# EAGLE board stm32rf_node_panelized (EAGLE 8.6.1)
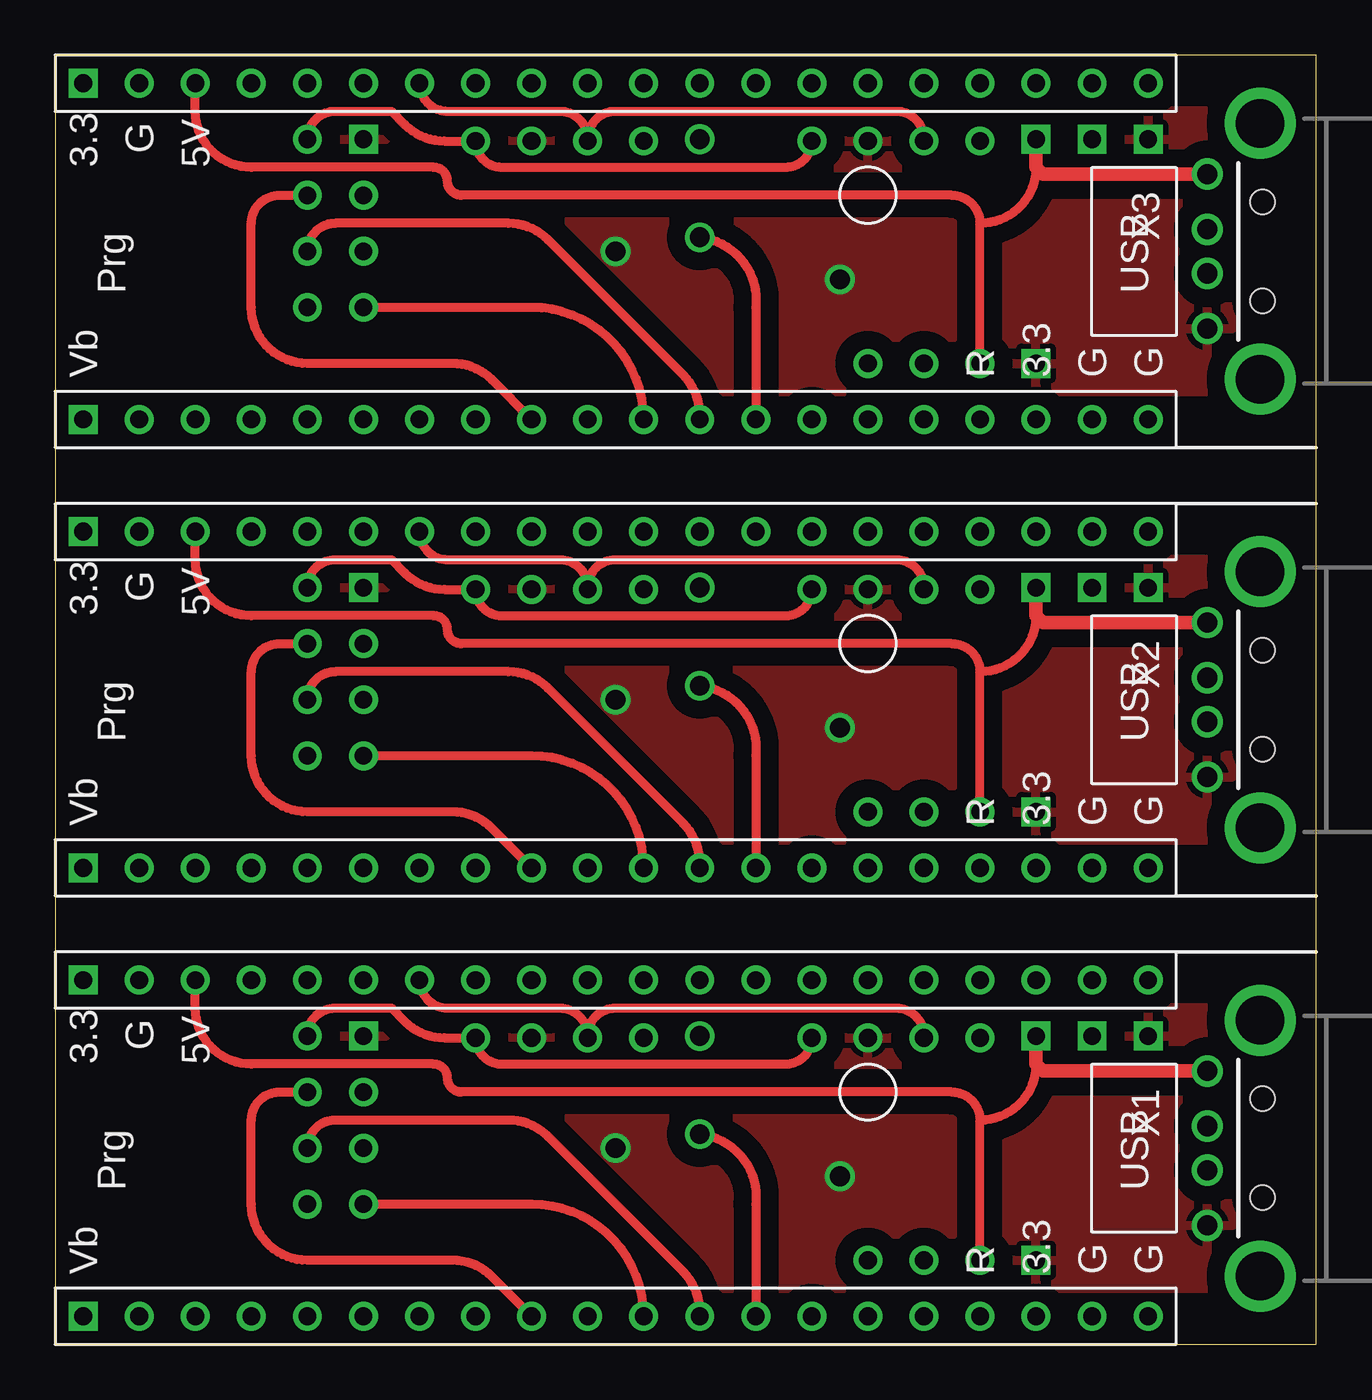
[diagram p0: board, top side]
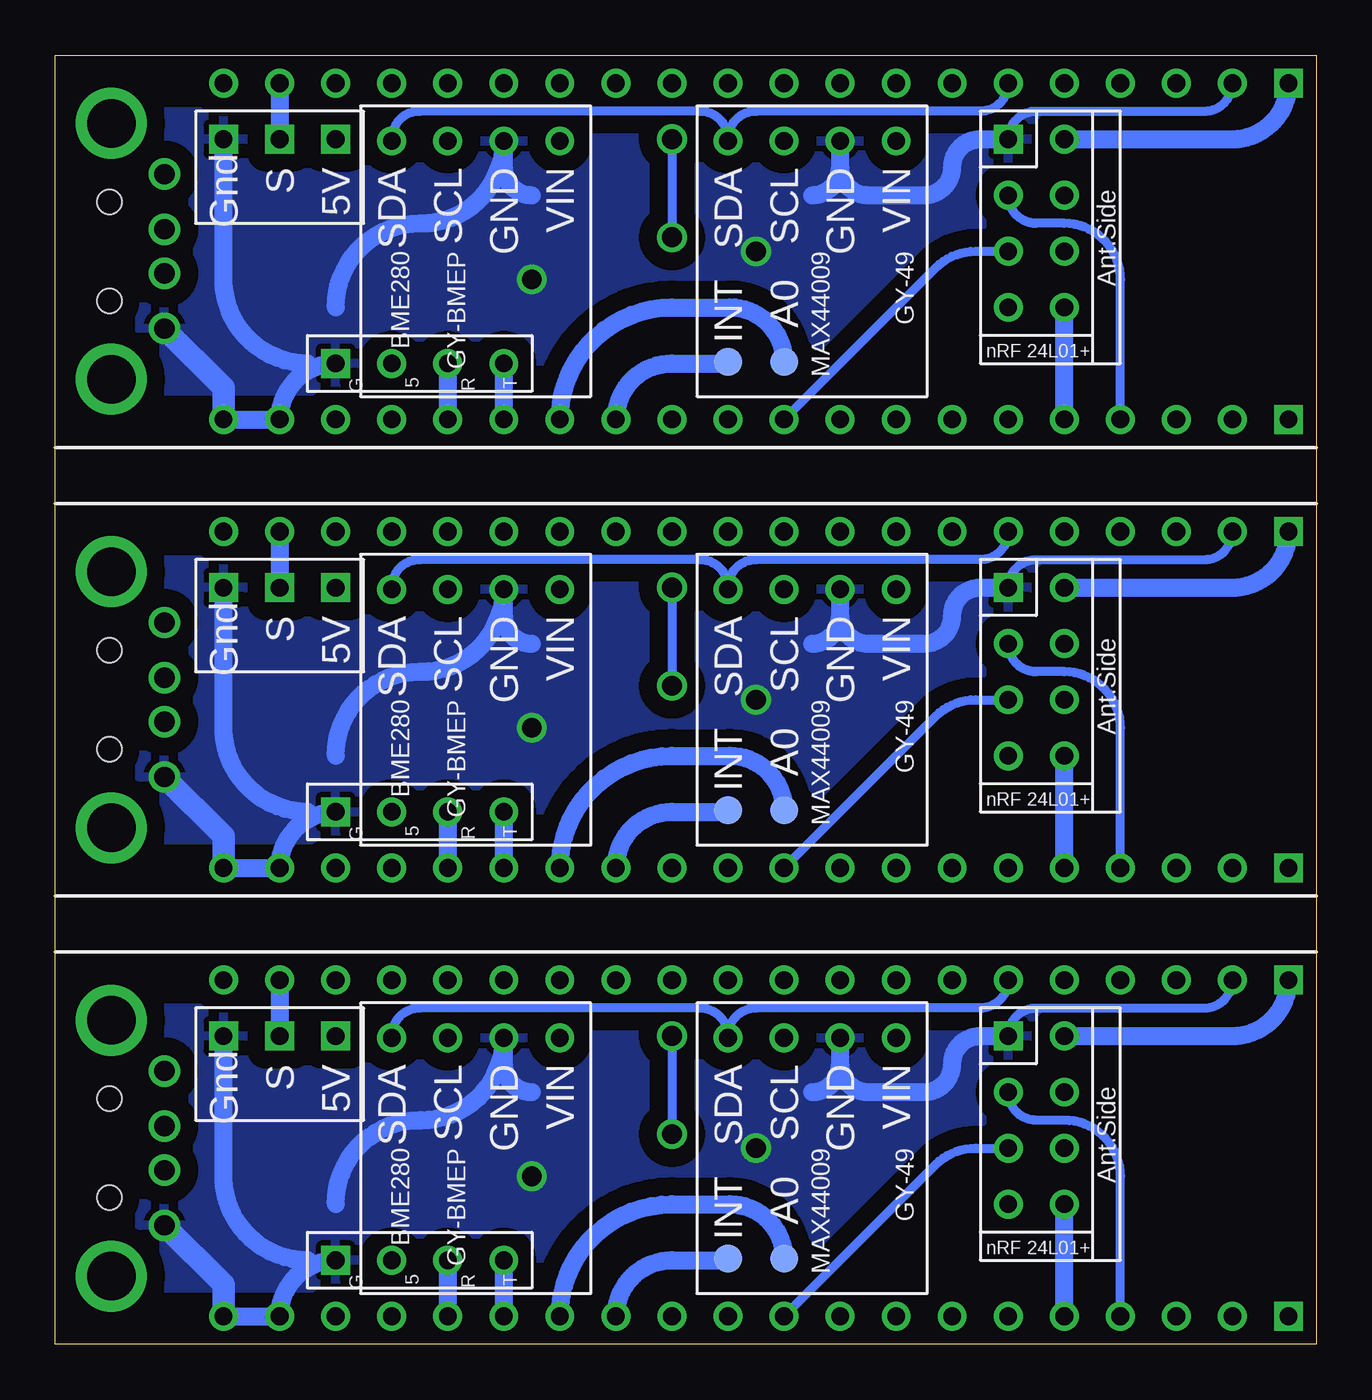
[diagram p1: board, bottom side, seen from below]

Size 57.16 x 58.42 mm. Coordinates in mm from the lower left corner, seen from the top.
Outline: 0,0 57.15,0 57.16,58.42 0,58.41 0,0
Copper layers (1*16): Top 0.035mm / dielectric 1.5mm / Bottom 0.035mm
Design rules "EagleRules": minimum track width 7mil, minimum drill 12mil, track to track 7mil, track to pad 7mil, pad to pad 7mil, via to via 7mil, smd to smd 0mil, copper to edge 20mil, drill to drill 10mil, minimum pad ring 10mil, minimum via ring 6mil, stop-mask expansion 2mil, vias tented up to drill 25mil, thermal gap 10mil

## Footprints (pad centres in the part's own frame; a part is rotated, then mirrored left to right if it is on the bottom)
STM32_BLUEPILL = drill 0.8: 3V3@1 -7.62,-19.05; 5V 7.62,19.05; GND@1 -7.62,-21.59; GND@2 -7.62,-24.13; GND@3 7.62,21.59; PA11 7.62,-6.35; PA12 7.62,-3.81; PA_0 -7.62,13.97; PA_1 -7.62,11.43; PA_2 -7.62,8.89; PA_3 -7.62,6.35; PA_4 -7.62,3.81; PA_5 -7.62,1.27; PA_6 -7.62,-1.27; PA_7 -7.62,-3.81; PA_8 7.62,-13.97; PA_9 7.62,-11.43; PA_10 7.62,-8.89; PA_15 7.62,-1.27; PB_0 -7.62,-6.35; PB_1 -7.62,-8.89; PB_3 7.62,1.27; PB_4 7.62,3.81; PB_5 7.62,6.35; PB_6 7.62,8.89; PB_7 7.62,11.43; PB_8 7.62,13.97; PB_9 7.62,16.51; PB_10 -7.62,-11.43; PB_11 -7.62,-13.97; PB_12 7.62,-24.13; PB_13 7.62,-21.59; PB_14 7.62,-19.05; PB_15 7.62,-16.51; PC_13 -7.62,21.59; PC_14 -7.62,19.05; PC_15 -7.62,16.51; RESET -7.62,-16.51 | drill 0.8 square: 3V3@2 7.62,24.13; VBAT -7.62,24.13
NRF24L01+REFDESIGN-MINI = drill 0.8 square: 1 -1.27,3.81 | drill 0.8: 2 1.27,3.81; 3 -1.27,1.27; 4 1.27,1.27; 5 -1.27,-1.27; 6 1.27,-1.27; 7 -1.27,-3.81; 8 1.27,-3.81
GY-BMEP-NOHOLE = drill 0.8: GND -5,1.27; SCL -5,-1.27; SDA -5,-3.81; VIN -5,3.81
GY-49-SURF = smd 1.27 x 1.27: A0 5,-1.27; INT 5,-3.81 | drill 0.8: GND -5,1.27; SCL -5,-1.27; SDA -5,-3.81; VIN -5,3.81
ONE_WIRE_RIGHT = drill 0.8 square: 5V 0,2.54; GND 0,-2.54; S 0,0
UART-MINI = drill 0.8 square: 1 0,0 | drill 0.8: 2 0,2.54; 3 0,5.08; 4 0,7.62
USB-A-H = drill 0.914: D+ 2.4,1; D- 2.4,-1; GND 2.4,3.5; VBUS 2.4,-3.5 | drill 2.2: GND@1 0,5.8; GND@2 0,-5.8 | hole 1.1: -0.1,2.25; -0.1,-2.25

## Placement (x,y rotation side)
U$1  STM32_BLUEPILL  [STM32_BLUEPILL]  25.4,8.89 90 top
U$2  NRF24L01+REFDESIGNMINI  [NRF24L01+REFDESIGN-MINI]  12.7,10.16 0 bottom
U$3  GY-BMEPGY-BMEP-NOHOLE  [GY-BMEP-NOHOLE]  38.1,8.89 270 bottom
U$4  GY-49G-49-SURF  [GY-49-SURF]  22.86,8.89 270 bottom
U$5  ONE_WIRE'RIGHT'  [ONE_WIRE_RIGHT]  46.99,13.97 270 bottom
U$6  UARTMINI  [UART-MINI]  44.45,3.81 270 bottom
U$7  STM32_BLUEPILL  [STM32_BLUEPILL]  25.4,29.21 90 top
U$8  NRF24L01+REFDESIGNMINI  [NRF24L01+REFDESIGN-MINI]  12.7,30.48 0 bottom
U$9  GY-BMEPGY-BMEP-NOHOLE  [GY-BMEP-NOHOLE]  38.1,29.21 270 bottom
U$10  GY-49G-49-SURF  [GY-49-SURF]  22.86,29.21 270 bottom
U$11  ONE_WIRE'RIGHT'  [ONE_WIRE_RIGHT]  46.99,34.29 270 bottom
U$12  UARTMINI  [UART-MINI]  44.45,24.13 270 bottom
U$13  STM32_BLUEPILL  [STM32_BLUEPILL]  25.4,49.53 90 top
U$14  NRF24L01+REFDESIGNMINI  [NRF24L01+REFDESIGN-MINI]  12.7,50.8 0 bottom
U$15  GY-BMEPGY-BMEP-NOHOLE  [GY-BMEP-NOHOLE]  38.1,49.53 270 bottom
U$16  GY-49G-49-SURF  [GY-49-SURF]  22.86,49.53 270 bottom
U$17  ONE_WIRE'RIGHT'  [ONE_WIRE_RIGHT]  46.99,54.61 270 bottom
U$18  UARTMINI  [UART-MINI]  44.45,44.45 270 bottom
X1  USB-A-H  [USB-A-H]  54.61,8.89 180 top
X2  USB-A-H  [USB-A-H]  54.61,29.21 180 top
X3  USB-A-H  [USB-A-H]  54.61,49.53 180 top

## Library data of the parts
U$1 U$7 U$13 = stm32_bluepill
U$2 U$8 U$14 = nRF24L01+RefDesign
U$3 U$9 U$15 = GY-BMEP
U$4 U$10 U$16 = GY-49
U$5 U$11 U$17 = one-wire
U$6 U$12 U$18 = WFConnectors
X1-X3 = usb

## Nets
3V1: U$7.3V3@2 U$8.2 U$9.VIN U$10.VIN
3V2: U$13.3V3@2 U$14.2 U$15.VIN U$16.VIN
3V3: U$1.3V3@2 U$2.2 U$3.VIN U$4.VIN
5V: U$1.5V U$5.5V U$6.2 X1.VBUS
5V1: U$7.5V U$11.5V U$12.2 X2.VBUS
5V2: U$13.5V U$17.5V U$18.2 X3.VBUS
GND: U$1.GND@1 U$1.GND@2 U$1.GND@3 U$2.1 U$3.GND U$4.GND U$5.GND U$6.1 X1.GND
GND1: U$7.GND@1 U$7.GND@2 U$7.GND@3 U$8.1 U$9.GND U$10.GND U$11.GND U$12.1 X2.GND
GND2: U$13.GND@1 U$13.GND@2 U$13.GND@3 U$14.1 U$15.GND U$16.GND U$17.GND U$18.1 X3.GND
INT: U$1.PB_0 U$4.INT
INT1: U$7.PB_0 U$10.INT
INT2: U$13.PB_0 U$16.INT
N$1: U$1.PA_7 U$2.6
N$2: U$1.PA_6 U$2.7
N$3: U$1.PA_5 U$2.5
N$4: U$1.PA_4 U$2.4
N$5: U$1.PB_1 U$4.A0
N$6: U$1.PA_0 U$2.8
N$7: U$1.PB_10 U$6.4
N$8: U$1.PB_11 U$6.3
N$9: U$1.PB_6 U$3.SCL U$4.SCL
N$10: U$1.PB_7 U$3.SDA U$4.SDA
N$11: U$1.PC_15 U$2.3
N$12: U$1.PB_13 U$5.S
N$13: U$7.PB_10 U$12.4
N$14: U$7.PB_11 U$12.3
N$15: U$7.PB_6 U$9.SCL U$10.SCL
N$16: U$7.PB_7 U$9.SDA U$10.SDA
N$17: U$7.PA_7 U$8.6
N$18: U$7.PA_6 U$8.7
N$19: U$7.PA_5 U$8.5
N$20: U$7.PA_4 U$8.4
N$21: U$7.PB_1 U$10.A0
N$22: U$7.PA_0 U$8.8
N$23: U$7.PC_15 U$8.3
N$24: U$7.PB_13 U$11.S
N$25: U$13.PB_10 U$18.4
N$26: U$13.PB_11 U$18.3
N$27: U$13.PB_6 U$15.SCL U$16.SCL
N$28: U$13.PB_7 U$15.SDA U$16.SDA
N$29: U$13.PA_7 U$14.6
N$30: U$13.PA_6 U$14.7
N$31: U$13.PA_5 U$14.5
N$32: U$13.PA_4 U$14.4
N$33: U$13.PB_1 U$16.A0
N$34: U$13.PA_0 U$14.8
N$35: U$13.PC_15 U$14.3
N$36: U$13.PB_13 U$17.S

## Tracks (layer width: path | path; a pad name or v marks a point on that pad's centre or on a via)
3V1
  Top 0.406: U$8.2 arc-90 12.7,35.56 15.24,35.56 15.85,34.95 arc45 17.64,34.21 U$10.VIN arc90 20.24,33.02 33.1,33.02 arc90 U$9.VIN
  Bottom 0.813: U$8.2 3.81,34.29 arc-90 U$7.3V3@2
3V2
  Top 0.406: U$14.2 arc-90 12.7,55.88 15.24,55.88 15.85,55.27 arc45 17.64,54.53 U$16.VIN arc90 20.24,53.34 33.1,53.34 arc90 U$15.VIN
  Bottom 0.813: U$14.2 3.81,54.61 arc-90 U$13.3V3@2
3V3
  Top 0.406: U$2.2 arc-90 12.7,15.24 15.24,15.24 15.85,14.63 arc45 17.64,13.89 U$4.VIN arc90 20.24,12.7 33.1,12.7 arc90 U$3.VIN
  Bottom 0.813: U$2.2 3.81,13.97 arc-90 U$1.3V3@2
5V
  Top 0.406: 41.91,10.16 arc90 40.64,11.43 18.41,11.43 arc-90 17.78,12.06 arc90 17.14,12.7 8.89,12.7 arc-90 6.35,15.24 U$1.5V | U$6.2 41.91,10.16 | 44.45,12.7 arc-90 41.91,10.16
  Top 0.61: U$5.5V 44.45,12.7 44.76,12.39 X1.VBUS
5V1
  Top 0.406: 41.91,30.48 arc90 40.64,31.75 18.41,31.75 arc-90 17.78,32.38 arc90 17.14,33.02 8.89,33.02 arc-90 6.35,35.56 U$7.5V | U$12.2 41.91,30.48 | 44.45,33.02 arc-90 41.91,30.48
  Top 0.61: U$11.5V 44.45,33.02 44.76,32.71 X2.VBUS
5V2
  Top 0.406: 41.91,50.8 arc90 40.64,52.07 18.41,52.07 arc-90 17.78,52.7 arc90 17.14,53.34 8.89,53.34 arc-90 6.35,55.88 U$13.5V | U$18.2 41.91,50.8 | 44.45,53.34 arc-90 41.91,50.8
  Top 0.61: U$17.5V 44.45,53.34 44.76,53.03 X3.VBUS
GND  (via drill 0.9)
  Bottom 0.406: U$2.1 arc90 12.7,15.24 5.08,15.24 arc-90 U$1.GND@3
  Bottom 0.813: U$1.GND@2 U$1.GND@1 arc90 U$6.1 | 45.72,3.81 arc90 49.53,7.62 U$5.GND | 44.45,6.35 arc90 40.64,10.16 40.56,10.16 arc-90 U$3.GND 36.83,12.7 arc-90 35.56,11.43 | 22.86,11.43 arc-90 21.59,12.7 | U$4.GND 21.59,12.7 | 21.59,12.7 arc-90 20.32,11.43 17.78,11.43 arc-90 16.51,12.7 arc90 15.24,13.97 U$2.1
  Bottom 1.016: X1.GND 49.53,2.71 U$1.GND@2
  other vias: 35.56,7.62 25.4,8.89
  pour Bottom (isolate 0.813): 8.89,15.24 8.89,2.54 53.34,2.54 53.34,15.24
  pour Top (isolate 0.813): 8.89,15.24 8.89,2.54 53.34,2.54 53.34,15.24
GND1  (via drill 0.9)
  Bottom 0.406: U$8.1 arc90 12.7,35.56 5.08,35.56 arc-90 U$7.GND@3
  Bottom 0.813: U$7.GND@2 U$7.GND@1 arc90 U$12.1 | 45.72,24.13 arc90 49.53,27.94 U$11.GND | 44.45,26.67 arc90 40.64,30.48 40.56,30.48 arc-90 U$9.GND 36.83,33.02 arc-90 35.56,31.75 | 22.86,31.75 arc-90 21.59,33.02 | U$10.GND 21.59,33.02 | 21.59,33.02 arc-90 20.32,31.75 17.78,31.75 arc-90 16.51,33.02 arc90 15.24,34.29 U$8.1
  Bottom 1.016: X2.GND 49.53,23.03 U$7.GND@2
  other vias: 35.56,27.94 25.4,29.21
  pour Bottom (isolate 0.813): 8.89,35.56 8.89,22.86 53.34,22.86 53.34,35.56
  pour Top (isolate 0.813): 8.89,35.56 8.89,22.86 53.34,22.86 53.34,35.56
GND2  (via drill 0.9)
  Bottom 0.406: U$14.1 arc90 12.7,55.88 5.08,55.88 arc-90 U$13.GND@3
  Bottom 0.813: U$13.GND@2 U$13.GND@1 arc90 U$18.1 | 45.72,44.45 arc90 49.53,48.26 U$17.GND | 44.45,46.99 arc90 40.64,50.8 40.56,50.8 arc-90 U$15.GND 36.83,53.34 arc-90 35.56,52.07 | 22.86,52.07 arc-90 21.59,53.34 | U$16.GND 21.59,53.34 | 21.59,53.34 arc-90 20.32,52.07 17.78,52.07 arc-90 16.51,53.34 arc90 15.24,54.61 U$14.1
  Bottom 1.016: X3.GND 49.53,43.35 U$13.GND@2
  other vias: 35.56,48.26 25.4,49.53
  pour Bottom (isolate 0.813): 8.89,55.88 8.89,43.18 53.34,43.18 53.34,55.88
  pour Top (isolate 0.813): 8.89,55.88 8.89,43.18 53.34,43.18 53.34,55.88
INT  (via drill 0.9)
  Top 0.406: v29.21,9.53 arc-90 31.75,6.35 U$1.PB_0
  Bottom 0.406: v29.21,13.97 v29.21,9.53
  Bottom 0.813: U$1.PB_0 arc90 29.21,3.81 26.75,3.81 arc-90 U$4.INT
INT1  (via drill 0.9)
  Top 0.406: v29.21,29.84 arc-90 31.75,26.67 U$7.PB_0
  Bottom 0.406: v29.21,34.29 v29.21,29.84
  Bottom 0.813: U$7.PB_0 arc90 29.21,24.13 26.75,24.13 arc-90 U$10.INT
INT2  (via drill 0.9)
  Top 0.406: v29.21,50.16 arc-90 31.75,46.99 U$13.PB_0
  Bottom 0.406: v29.21,54.61 v29.21,50.16
  Bottom 0.813: U$13.PB_0 arc90 29.21,44.45 26.75,44.45 arc-90 U$16.INT
N$1
  Top 0.406: U$2.6 arc-90 12.7,10.16 20.54,10.16 arc-45 22.33,9.42 28.47,3.28 arc-45 29.21,1.49 U$1.PA_7
N$2
  Top 0.406: U$1.PA_6 arc90 21.59,6.35 U$2.7
N$3
  Bottom 0.406: U$2.5 15.46,8.89 arc-45 17.25,8.15 U$1.PA_5
N$4
  Top 0.406: U$1.PA_4 19.79,3.07 arc45 18,3.81 11.43,3.81 arc-90 8.89,6.35 8.89,10.16 arc-90 10.16,11.43 U$2.4
N$5
  Bottom 0.813: U$1.PB_1 arc90 29.21,6.35 26.59,6.35 arc90 U$4.A0
N$6
  Bottom 0.813: U$1.PA_0 U$2.8
N$7
  Bottom 0.813: U$6.4 U$1.PB_10
N$8
  Bottom 0.813: U$6.3 U$1.PB_11
N$9
  Top 0.406: U$1.PB_6 arc90 17.78,15.24 22.86,15.24 arc-90 24.13,13.97 | 24.13,13.97 U$4.SCL 24.13,13.97 | 24.13,13.97 arc-90 25.4,15.24 38.1,15.24 arc-90 39.37,13.97 U$3.SCL
N$10
  Bottom 0.406: U$1.PB_7 arc90 15.24,15.24 25.4,15.24 arc-90 26.67,13.97 | 26.67,13.97 U$4.SDA 26.67,13.97 | 26.67,13.97 arc-90 27.94,15.24 40.64,15.24 arc-90 41.91,13.97 U$3.SDA
N$11
  Bottom 0.406: U$1.PC_15 8.89,7.62 arc-90 11.43,10.16 12.7,10.16 arc90 U$2.3
N$12
  Bottom 0.813: U$1.PB_13 U$5.S
N$13
  Bottom 0.813: U$12.4 U$7.PB_10
N$14
  Bottom 0.813: U$12.3 U$7.PB_11
N$15
  Top 0.406: U$7.PB_6 arc90 17.78,35.56 22.86,35.56 arc-90 24.13,34.29 | 24.13,34.29 U$10.SCL 24.13,34.29 | 24.13,34.29 arc-90 25.4,35.56 38.1,35.56 arc-90 39.37,34.29 U$9.SCL
N$16
  Bottom 0.406: U$7.PB_7 arc90 15.24,35.56 25.4,35.56 arc-90 26.67,34.29 | 26.67,34.29 U$10.SDA 26.67,34.29 | 26.67,34.29 arc-90 27.94,35.56 40.64,35.56 arc-90 41.91,34.29 U$9.SDA
N$17
  Top 0.406: U$8.6 arc-90 12.7,30.48 20.54,30.48 arc-45 22.33,29.74 28.47,23.6 arc-45 29.21,21.81 U$7.PA_7
N$18
  Top 0.406: U$7.PA_6 arc90 21.59,26.67 U$8.7
N$19
  Bottom 0.406: U$8.5 15.46,29.21 arc-45 17.25,28.47 U$7.PA_5
N$20
  Top 0.406: U$7.PA_4 19.79,23.39 arc45 18,24.13 11.43,24.13 arc-90 8.89,26.67 8.89,30.48 arc-90 10.16,31.75 U$8.4
N$21
  Bottom 0.813: U$7.PB_1 arc90 29.21,26.67 26.59,26.67 arc90 U$10.A0
N$22
  Bottom 0.813: U$7.PA_0 U$8.8
N$23
  Bottom 0.406: U$7.PC_15 8.89,27.94 arc-90 11.43,30.48 12.7,30.48 arc90 U$8.3
N$24
  Bottom 0.813: U$7.PB_13 U$11.S
N$25
  Bottom 0.813: U$18.4 U$13.PB_10
N$26
  Bottom 0.813: U$18.3 U$13.PB_11
N$27
  Top 0.406: U$13.PB_6 arc90 17.78,55.88 22.86,55.88 arc-90 24.13,54.61 | 24.13,54.61 U$16.SCL 24.13,54.61 | 24.13,54.61 arc-90 25.4,55.88 38.1,55.88 arc-90 39.37,54.61 U$15.SCL
N$28
  Bottom 0.406: U$13.PB_7 arc90 15.24,55.88 25.4,55.88 arc-90 26.67,54.61 | 26.67,54.61 U$16.SDA 26.67,54.61 | 26.67,54.61 arc-90 27.94,55.88 40.64,55.88 arc-90 41.91,54.61 U$15.SDA
N$29
  Top 0.406: U$14.6 arc-90 12.7,50.8 20.54,50.8 arc-45 22.33,50.06 28.47,43.92 arc-45 29.21,42.13 U$13.PA_7
N$30
  Top 0.406: U$13.PA_6 arc90 21.59,46.99 U$14.7
N$31
  Bottom 0.406: U$14.5 15.46,49.53 arc-45 17.25,48.79 U$13.PA_5
N$32
  Top 0.406: U$13.PA_4 19.79,43.71 arc45 18,44.45 11.43,44.45 arc-90 8.89,46.99 8.89,50.8 arc-90 10.16,52.07 U$14.4
N$33
  Bottom 0.813: U$13.PB_1 arc90 29.21,46.99 26.59,46.99 arc90 U$16.A0
N$34
  Bottom 0.813: U$13.PA_0 U$14.8
N$35
  Bottom 0.406: U$13.PC_15 8.89,48.26 arc-90 11.43,50.8 12.7,50.8 arc90 U$14.3
N$36
  Bottom 0.813: U$13.PB_13 U$17.S